# Altium PCB PCB_Akira_Joystick_2024-01-05.pcbdoc
Units mil, origin at the board's own origin, x right, y up, seen from the top; angles counter-clockwise.
Board outline 6165 x 3175.26 mil, 2 copper layers (Top Layer, Bottom Layer); 38 components, 36 nets, 153 pads, 44 vias.
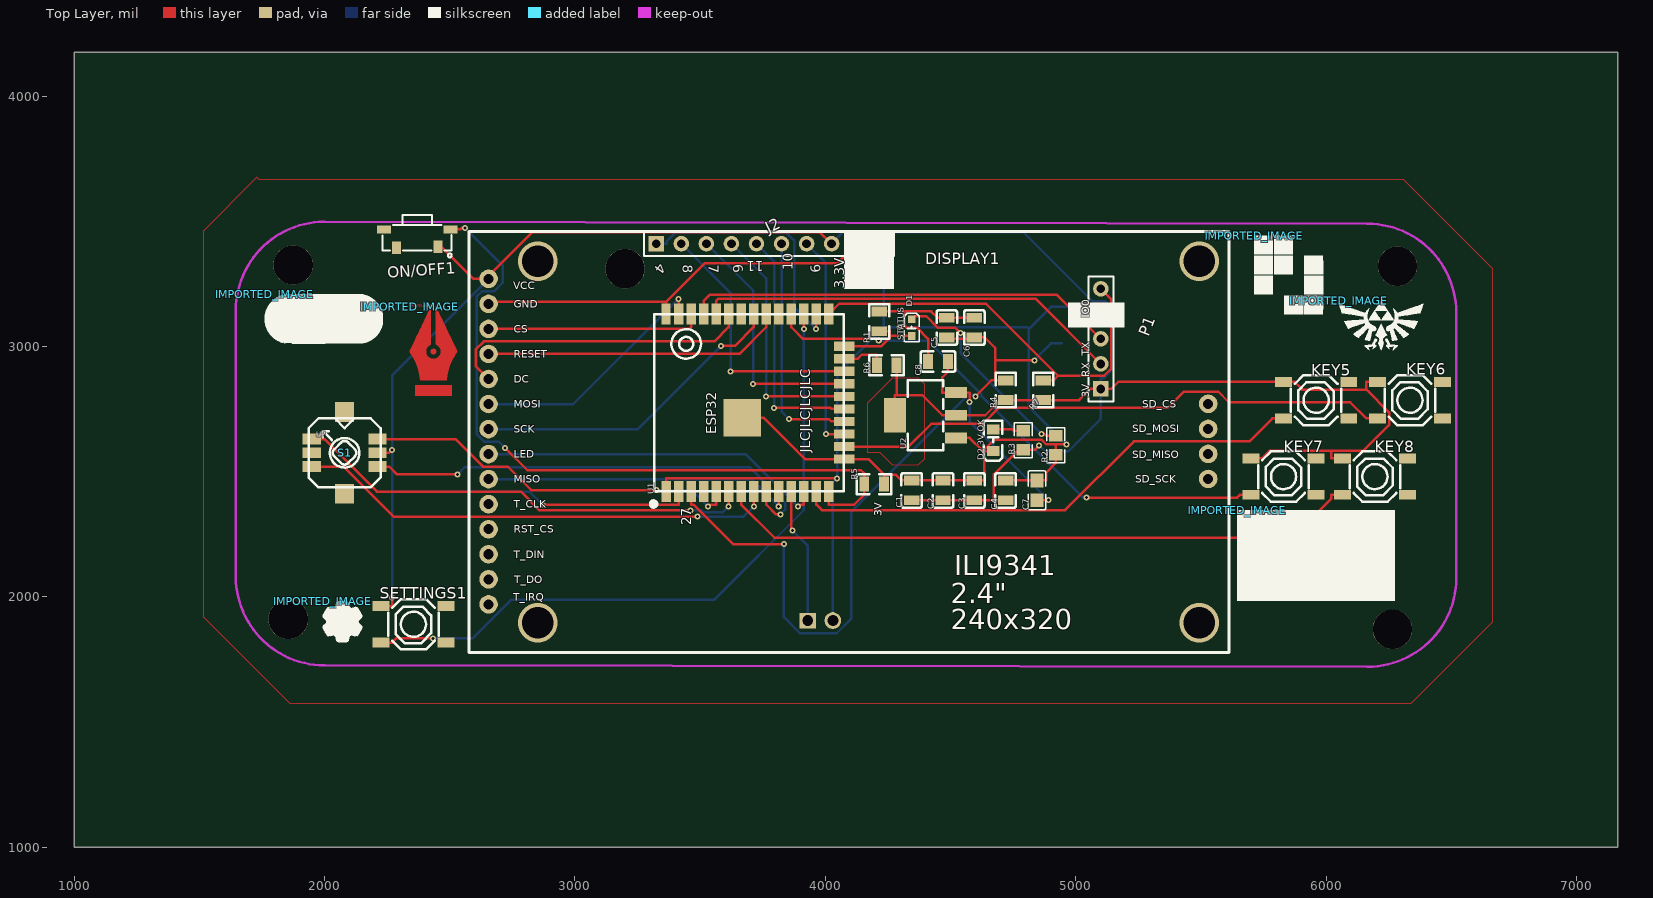
[diagram p0: Top Layer view]
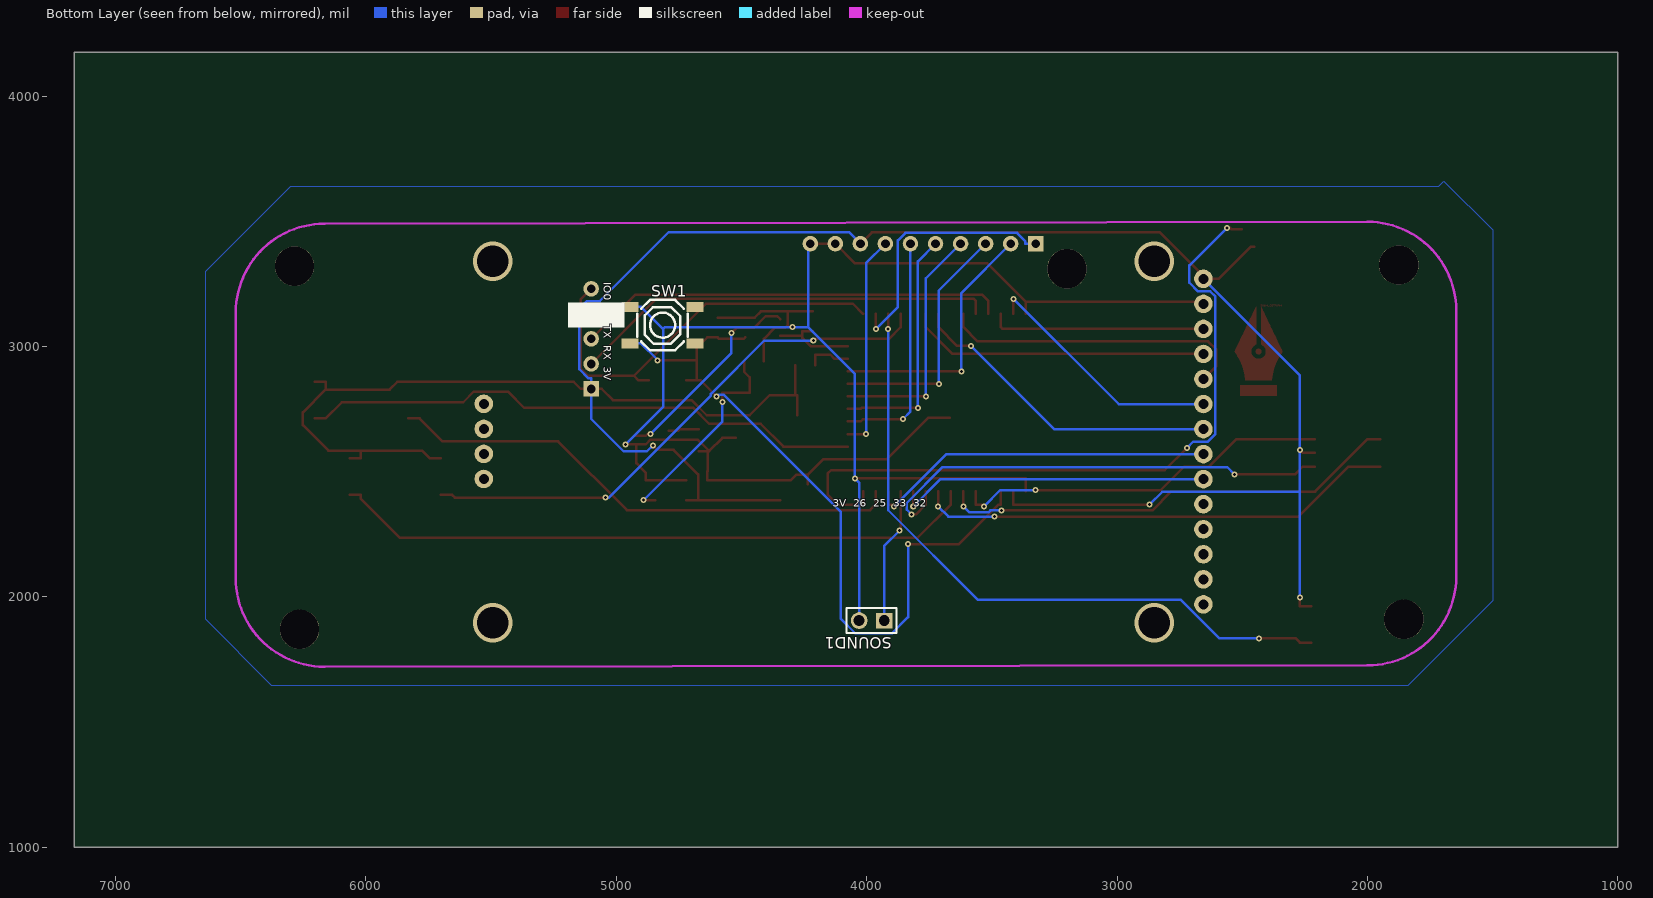
[diagram p1: Bottom Layer view, seen from below]

## Layer stack, top to bottom
Top Layer: signal copper (thickness not stored)
Dielectric: dielectric 12.6, FR-4, Dk 4.8
Bottom Layer: signal copper (thickness not stored)

## Board outline
7165,1000 1000,1000 1000,4175.26 7165,4175.26

## Components (designator, comment, footprint, x,y, rotation, side; value= is the part's Value field where it differs from the comment)
C1 "10uF" C0805#1 4345,2425.26 r270 top
C2 "10uF" C0805#1 4470,2425.26 r270 top
C3 "10uF" C0805#1 4595,2425.26 r90 top
C4 "100nF" C0805#1 4720,2425.26 r270 top
C5 "1uF" C0805#1 4485,3075.26 r270 top
C6 "100nF" C0805#1 4595,3075.26 r270 top
C7 "10uF" C0805#2 4845,2425.26 r270 top
C8 "100nF" C0805#1 4450,2940.26 r180 top
D1 "STATUS (BLUE)" LED0603-R-RD 4345,3075.26 r270 top
D2 "YELLOW" LED0805-RD 4670,2625.26 r90 top
DISPLAY1 "2.4_TFT_ILI9341_symbol" ILI9341_320X240_TFT_LCD 2655,3380.26 r0 top
IMPORTED_IMAGE "IMPORTED_IMAGE" IMPORTED_IMAGE#1 1761,3208.18 r0 top
IMPORTED_IMAGE "IMPORTED_IMAGE" IMPORTED_IMAGE#1 5645,2345.81 r0 top
IMPORTED_IMAGE "IMPORTED_IMAGE" IMPORTED_IMAGE#1 5712.18,3441.96 r0 top
IMPORTED_IMAGE "IMPORTED_IMAGE" IMPORTED_IMAGE#1 6051.12,3181.83 r0 top
IMPORTED_IMAGE "IMPORTED_IMAGE" IMPORTED_IMAGE#1 1992.99,1982.24 r0 top
IMPORTED_IMAGE "IMPORTED_IMAGE" IMPORTED_IMAGE#2 2339.78,3157.82 r0 top
J2 "HDR-M-2.54_1x10" HDR-M-2.54_1X10 3775,3410.26 r0 top
KEY5 "BUTTON_C9900016052" SW-SMD_4P-L5.1-W5.1-P3.70-LS6.5-TL-2#1 5960,2785.26 r0 top
KEY6 "BUTTON_C9900016052" SW-SMD_4P-L5.1-W5.1-P3.70-LS6.5-TL-2#1 6335,2785.26 r0 top
KEY7 "BUTTON_C9900016052" SW-SMD_4P-L5.1-W5.1-P3.70-LS6.5-TL-2#1 5830,2480.26 r0 top
KEY8 "BUTTON_C9900016052" SW-SMD_4P-L5.1-W5.1-P3.70-LS6.5-TL-2#1 6195,2480.26 r0 top
ON/OFF1 "TL3330AF260QG" SW-SMD_E-SWITCH_TL3330 2370,3430.3 r180 top
P1 "Header-Male-2.54_1x5" HDR-5X1/2.54 5100,3030.26 r90 top
R1 "10K" R0805#1 4215,3100.26 r270 top
R2 "470Ω" R0805#2 4920,2605.26 r270 top
R3 "470Ω" R0805#2 4790,2625.26 r270 top
R4 "10K" R0805#1 4720,2825.26 r270 top
R5 "10K" R0805#1 4195,2450.26 r180 top
R6 "10K" R0805#1 4245,2925.26 r180 top
R7 "10K" R0805#1 4870,2825.26 r90 top
S1 "JOYSTICK_MINI" JOYSTICK_MINI 2080,2575.26 r0 top
SETTINGS1 "BUTTON_C9900016052" SW-SMD_4P-L5.1-W5.1-P3.70-LS6.5-TL-2#1 2355,1890.26 r0 top
SOUND1 "HDR-M-2.54_1x2" HDR-M-2.54_1X2 3980,1905.26 r180 bottom
SW1 "RESET" SW-SMD_4P-L5.1-W5.1-P3.70-LS6.5-TL-2#2 4815,3085.26 r0 bottom
U1 "ESP32" WIFIM-SMD_38P-L19.2-W18.0-P1.27 3720,2775.26 r180 top
U2 "AMS1117-3.3" SOT-223-3_L6.5-W3.4-P2.30-LS7.0-BR 4400,2725.26 r0 top
? "" ? 4085,2078.63 r0 top

## Footprints (in the part's own frame and the unit in brackets; to place one, negate y for a bottom-side part, rotate by r counter-clockwise, add the part's x,y. Pads: shape width x height; smd on the part's side, far side on the other; paste and mask are expansions set on the pad)
C0805#1 [mm]
  rect 1x1.55 smd: 1(-1,0) 2(1,0)
  silkscreen extent -1.75,-1.04 1.75,1.04
C0805#2 [mm]
  rect 1.41x1.35 smd: 1(-1,0) 2(1,0)
  silkscreen extent -1.96,-0.9 1.96,0.9
HDR-5X1/2.54 [mil]
  rect 62x62 hole 35: 1(-200,0)
  round 62 hole 35: 2(-100,0) 3(0,0) 4(100,0) 5(200,0)
  silkscreen extent -250,-50 250,50
HDR-M-2.54_1X2 [mm]
  rect 1.7x1.575 hole 1.1: 1(1.27,0)
  round 1.7 hole 1.1: 2(-1.27,0)
  silkscreen extent -2.54,-1.27 2.54,1.27
HDR-M-2.54_1X10 [mil]
  rect 62x62 hole 35: 1(-450,0)
  round 62 hole 35: 2(-350,0) 3(-250,0) 4(-150,0) 5(-50,0) 6(50,0) 7(150,0) 8(250,0) 9(350,0) 10(450,0)
  silkscreen extent -500,-50 500,50
ILI9341_320X240_TFT_LCD [mm]
  round 1.88 hole 1.02: 1(0,-2.8) 2(0,-5.34) 3(0,-7.88) 4(0,-10.42) 5(0,-12.96) 6(0,-15.5) 7(0,-18.04) 8(0,-20.58) 9(0,-23.12) 10(0,-25.66) 11(0,-28.2) 12(0,-30.74) 13(0,-33.28) 14(0,-35.82) 15(73,-23.1) 16(73,-20.56) 17(73,-18.02) 18(73,-15.48)
  silkscreen extent -2,-40.7 75.1,2
IMPORTED_IMAGE#1 [mil]
  silkscreen extent 0,-197 472,0
IMPORTED_IMAGE#2 [mil]
  Top Layer region: 21.63,-355.12 21.63,-312.71 168.52,-312.71 168.52,-355.12
  Top Layer region: 532 vertices and 0 holes, not listed, extent -0.25,-293.03 190.71,0
  Top Layer region: 94.56,-189.47 94.1,-189.46 93.66,-189.41 93.21,-189.35 92.77,-189.26 92.34,-189.16 91.91,-189.03 91.49,-188.88 91.07,-188.71 90.66,-188.52 90.26,-188.31 89.87,-188.09 89.48,-187.84 89.11,-187.58 88.74,-187.31 88.39,-187.01 88.04,-186.71 87.7,-186.39 87.38,-186.05 87.07,-185.7 86.77,-185.34 86.48,-184.97 86.21,-184.59 85.95,-184.19 85.7,-183.79 85.47,-183.38 85.25,-182.96 85.05,-182.53 84.86,-182.09 84.7,-181.65 84.54,-181.2 84.41,-180.74 84.29,-180.28 84.19,-179.82 84.11,-179.35 84.05,-178.88 84.01,-178.41 83.99,-177.94 83.99,-177.46 84.02,-176.99 84.06,-176.51 84.12,-176.04 84.21,-175.57 84.32,-175.1 84.46,-174.63 84.62,-174.16 84.8,-173.7 85.01,-173.25 85.24,-172.8 85.5,-172.35 85.79,-171.92 86.1,-171.49 86.44,-171.06 86.81,-170.65 87.57,-169.93 88.43,-169.29 89.36,-168.75 90.36,-168.29 91.4,-167.92 92.48,-167.65 93.59,-167.46 94.7,-167.37 95.81,-167.36 96.9,-167.46 97.95,-167.64 98.96,-167.92 99.9,-168.29 100.77,-168.76 101.55,-169.33 102.23,-169.99 102.74,-170.58 103.2,-171.18 103.63,-171.79 104.02,-172.39 104.37,-172.99 104.68,-173.6 104.96,-174.2 105.19,-174.81 105.39,-175.41 105.55,-176.01 105.68,-176.61 105.76,-177.21 105.81,-177.8 105.82,-178.39 105.79,-178.98 105.72,-179.56 105.62,-180.14 105.48,-180.72 105.3,-181.28 105.09,-181.84 104.84,-182.4 104.55,-182.94 104.22,-183.48 103.86,-184.01 103.46,-184.54 103.03,-185.05 102.55,-185.55 102.04,-186.04 101.5,-186.53 100.91,-187 100.29,-187.46 99.64,-187.91 99.18,-188.19 98.71,-188.45 98.25,-188.67 97.78,-188.87 97.32,-189.04 96.85,-189.18 96.39,-189.29 95.93,-189.37 95.47,-189.43 95.01,-189.46
JOYSTICK_MINI [mil]
  rect 72.8x43.3 smd: A(-131,55) B(131,55) C(-131,-55) CTR(-131,0) D(131,-55) GND(131,0)
  rect 74.8x78.7 smd: NC(0,163) NC@0(0,-163)
  silkscreen extent -144,-138 144,138
LED0603-R-RD [mm]
  rect 0.8x0.8 smd: 1(0.851,0) 2(-0.851,0)
  silkscreen extent -1.44,-0.75 1.44,0.75
LED0805-RD [mm]
  rect 1x1.25 smd: 1(-1.1,0) 2(1.1,0)
  silkscreen extent -2.1,-0.95 1.98,0.96
R0805#1 [mm]
  rect 1x1.55 smd: 1(-1,0) 2(1,0)
  silkscreen extent -1.75,-1.02 1.75,1.02
R0805#2 [mm]
  rect 1.133x1.377 smd: 1(-0.966,0) 2(0.966,0)
  silkscreen extent -1.76,-0.92 1.76,0.92
SOT-223-3_L6.5-W3.4-P2.30-LS7.0-BR [mm]
  rect 2.2x1.1 smd: 1(3.099,-2.3) 2(3.099,0) 3(3.099,2.3)
  rect 2.2x3.5 smd: 4(-3.099,0)
  silkscreen extent -1.8,-3.55 1.8,3.55
SW-SMD_4P-L5.1-W5.1-P3.70-LS6.5-TL-2#1 [mm]
  rect 1.7x1 smd: 1(-3.3,1.85) 2(3.3,1.85) 3(-3.3,-1.85) 4(3.3,-1.85)
  silkscreen extent -2.55,-2.55 2.55,2.55
SW-SMD_4P-L5.1-W5.1-P3.70-LS6.5-TL-2#2 [mm]
  rect 1.7x1 smd: 1(3.3,-1.849) 2(-3.3,-1.85) 3(3.3,1.85) 4(-3.3,1.85)
  silkscreen extent -2.55,-2.55 2.55,2.55
SW-SMD_E-SWITCH_TL3330 [mm]
  rect 0.9x1.27 smd: 1(-2.1,0.84) 2(2.1,0.94)
  rect 1.45x0.8 smd: 3(3.375,-0.94) 4(-3.375,-0.94)
  silkscreen extent -3.5,-2.4 3.5,1.9
WIFIM-SMD_38P-L19.2-W18.0-P1.27 [mm]
  rect 0.95x2.1 smd: 1(9.045,9) 2(7.775,9) 3(6.505,9) 4(5.235,9) 5(3.965,9) 6(2.695,9) 7(1.425,9) 8(0.155,9) 9(-1.115,9) 10(-2.385,9) 11(-3.655,9) 12(-4.925,9) 13(-6.195,9) 14(-7.465,9) 25(-7.465,-9) 26(-6.195,-9) 27(-4.925,-9) 28(-3.655,-9) 29(-2.385,-9) 30(-1.115,-9) 31(0.155,-9) 32(1.425,-9) 33(2.695,-9) 34(3.965,-9) 35(5.235,-9) 36(6.505,-9) 37(7.775,-9) 38(9.045,-9)
  rect 2.1x0.95 smd: 15(-9.045,5.715) 16(-9.045,4.445) 17(-9.045,3.175) 18(-9.045,1.905) 19(-9.045,0.635) 20(-9.045,-0.635) 21(-9.045,-1.905) 22(-9.045,-3.175) 23(-9.045,-4.445) 24(-9.045,-5.715)
  rect 3.8x3.8 smd: 39(1.32,1.51)
  silkscreen extent -8.96,-9 10.55,10.51
? [mil]

## Free pads (board coordinates)
  round 157.48 hole 157.48 unplated: ""(1855,1910.26) ""(1875,3325.26) ""(3200,3310.26) ""(6265,1870.26) ""(6285,3320.26)

## Via types
v1: diameter 24.02, hole 12.01, Top Layer to Bottom Layer, tented both sides, 40 vias
v2: diameter 157.48, hole 125.98, Top Layer to Bottom Layer, tented both sides, 4 vias

## Nets (pads, with @x,y where several pads share a name; then routed paths per layer and width w, separated by ;. In a path a pad name is that pad's centre, name@x,y a point inside that pad or via, vN(x,y) a via of type N, cw(c..) or ccw(c..) an arc to the next point about the centre after c; other vN are vias at no path point)
3.3V: C7.2 C8.1 U2.3 | length 848.6
  Top Layer w10: C8.1 4489.37,2898.76 4467.7,2877.09 4467.7,2815.81 U2.3 4576.3,2815.81 4576.3,2810.87 4576.01,2810.58 4576.01,2791.48 4576.3,2791.19 v1(4576.3,2778.39) ; C7.2 v1(4891.02,2385.89)
  Bottom Layer w10: v1(4576.3,2778.39) 4576.3,2700.61 v1(4891.02,2385.89)
+3.3V: C1.2 C2.2 C3.1 C4.2 DISPLAY1.1 J2.8 KEY5.1 KEY6.1 KEY7.1 KEY8.1 ON/OFF1.1 P1.1 R3.2 R4.2 R6.1 R7.1 S1.GND SETTINGS1.1 U1.2 U2.2 U2.4 | length 10390
  Top Layer w10: S1.GND 2258.39,2575.26 2269.53,2586.4 v1(2269.53,2587.24) ; SETTINGS1.1 2269.53,1963.1 v1(2269.53,1998.06) ; ON/OFF1.1 2467.03,3397.23 2594.24,3270.02 DISPLAY1.1 2655,3281.62 2829.22,3455.84 3979.42,3455.84 J2.8 ; v1(2870.22,2368.53) 3413.83,2368.53 3413.9,2368.6 3413.9,2394.77 U1.2 ; U2.4 4278,2805.15 4284.37,2805.15 ; R6.1 4284.37,2805.15 ; C1.2 C2.2 C3.1 4673.12,2385.89 ; C4.2 4673.12,2385.89 ; v1(4854.11,2604.65) 4836.68,2587.22 R3.2 4770.95,2587.22 4673.12,2489.39 4673.12,2385.89 ; KEY7.1 5744.53,2553.1 5775.28,2583.85 6020.62,2583.85 ; KEY8.1 6020.62,2553.1 6020.62,2583.85 ; KEY6.1 6160.62,2858.1 6160.62,2827.36 ; 4284.37,2805.15 4387.81,2805.15 4467.7,2725.26 U2.2 4638.62,2725.26 4699.25,2785.89 R4.2 R7.1 5013.64,2785.89 5058.01,2830.26 P1.1 5121,2830.26 5141.99,2830.26 5169.83,2858.1 KEY5.1 5852.31,2858.1 5874.53,2858.1 5905.27,2827.36 6160.62,2827.36 ; 6020.62,2583.85 6149.59,2583.85 6251.43,2685.69 6251.43,2736.55 6160.62,2827.36
  Bottom Layer w10: v1(2269.53,1998.06) 2269.53,2419.36 ; DISPLAY1.1 2269.53,2884.55 v1(2269.53,2587.24) 2269.53,2419.36 ; v1(2870.22,2368.53) 2819.39,2419.36 2269.53,2419.36 ; J2.8 4071.21,3456.47 4790.33,3456.47 5065.96,3180.84 5116.28,3180.84 5147.91,3149.21 5147.91,2909.66 5110.5,2872.25 5100,2872.25 P1.1 5100,2710.75 4970.61,2581.36 4877.4,2581.36 v1(4854.11,2604.65)
CS: DISPLAY1.3 U1.36 | length 864.2
  Top Layer w10: DISPLAY1.3 3456.66,3070.02 3463.9,3077.26 U1.36
DC: DISPLAY1.5 U1.33 | length 1239
  Top Layer w10: DISPLAY1.5 2603.07,2921.95 2603.07,2987 2636.09,3020.02 3556.66,3020.02 3613.9,3077.26 U1.33
EN: C5.2 C6.2 R4.1 SW1.3 U1.3 | length 3007.7
  Top Layer w10: U1.3 3463.9,2368.6 3473.41,2368.6 3631.41,2210.6 v1(3834.29,2210.6) ; C5.2 4490.93,3029.96 4589.07,3029.96 C6.2 4636.5,3035.89 4678.5,2993.89 4678.5,2943.89 ; v1(4599.07,2801.03) 4662.67,2864.63 4678.5,2864.63 ; R4.1 4678.5,2864.63 ; v1(4836.17,2943.89) 4678.5,2943.89 ; 4678.5,2864.63 4678.5,2943.89
  Bottom Layer w10: v1(3834.29,2210.6) 3834.29,1919.02 3898.67,1854.64 4045.63,1854.64 4102.9,1911.91 4102.9,2338.24 4571.95,2807.29 4592.81,2807.29 v1(4599.07,2801.03) ; v1(4836.17,2943.89) 4836.17,2948.11 4900.47,3012.41 SW1.3
GND: C1.1 C2.1 C3.2 C4.1 C5.1 C6.1 C7.1 C8.2 D2.1 DISPLAY1.2 J2.9 J2.10 P1.4 R1.1 R2.2 R5.1 SOUND1.2 SW1.1 U1.1 U1.15 U1.38 U1.39 U2.1 | length 8240.4
  Top Layer w10: DISPLAY1.2 2662.93,3177.95 3363.9,3177.95 ; U1.1 3363.9,2473.26 3363.96,2473.32 v1(4047.12,2473.32) ; U1.38 3363.9,3177.95 ; U1.39 3753.82,2715.82 3919.38,2550.26 U1.15 4171.9,2550.26 4234.37,2487.79 ; R1.1 4315.12,3139.63 ; J2.10 J2.9 4046.26,3331.52 3517.47,3331.52 3363.9,3177.95 ; R5.1 4234.37,2487.79 ; v1(4296.52,3076.73) 4306.77,3076.73 4315.12,3085.08 ; C8.2 4410.63,3029.96 4365.33,3075.26 4324.94,3075.26 4315.12,3085.08 ; U2.1 4576.3,2634.71 4629.06,2581.95 4634.4,2581.95 ; C6.1 C5.1 4447.47,3114.63 4422.47,3139.63 4315.12,3139.63 ; D2.1 4634.4,2581.95 ; C4.1 C7.1 4882.57,2464.63 4882.57,2496.5 4920,2533.93 4920,2564.55 R2.2 4920,2600.5 4920,2609.14 ; v1(4962.38,2609.14) 4920,2609.14 ; 4234.37,2487.79 4280.34,2487.79 4303.5,2464.63 C1.1 C2.1 C3.2 4636.5,2464.63 4636.5,2501.07 4634.4,2503.17 4634.4,2581.95 ; 4315.12,3085.08 4315.12,3139.63 ; 4634.4,2581.95 4634.4,2587.29 4674.82,2627.71 4863.67,2627.71 4882.24,2609.14 4920,2609.14
  Bottom Layer w10: SOUND1.2 4030,2456.2 v1(4047.12,2473.32) 4047.12,2890.23 4232.97,3076.08 ; J2.10 4232.97,3402.29 4232.97,3076.08 ; v1(4296.52,3076.73) v1@4296.52,3076.08 ; v1(4962.38,2609.14) 4812.56,2758.96 4812.56,3070.15 ; P1.4 5017.18,3130.26 4989.38,3158.06 SW1.1 4900.47,3158.06 4812.56,3070.15 ; 4232.97,3076.08 v1@4296.52,3076.08 ; v1@4296.52,3076.08 4806.63,3076.08 4812.56,3070.15
GPIO0: P1.5 R7.2 U1.25 | length 1679.4
  Top Layer w10: U1.25 4054.69,3170.38 4642.29,3170.38 4929.77,2882.9 ; R7.2 4911.5,2864.63 4929.77,2882.9 ; P1.5 5142.33,3187.93 5142.33,2912.3 5112.93,2882.9 4929.77,2882.9
GPIO4: J2.1 U1.26 | length 1036.8
  Top Layer w10: v1(3962.79,3069.66) 3963.9,3070.77 U1.26
  Bottom Layer w10: J2.1 3366.99,3410.26 3366.99,3420.76 3399.39,3453.16 3845.39,3453.16 3875,3423.55 3875,3157.45 v1(3962.79,3069.66)
GPIO6: J2.4 U1.20 | length 979.7
  Top Layer w10: v1(3763.92,2800.26) U1.20
  Bottom Layer w10: J2.4 3763.92,3271.34 v1(3763.92,2800.26)
GPIO7: J2.3 U1.21 | length 1001.6
  Top Layer w10: v1(3711.97,2850.26) U1.21
  Bottom Layer w10: J2.3 3711.97,3223.29 v1(3711.97,2850.26)
GPIO8: J2.2 U1.22 | length 1045.7
  Top Layer w10: v1(3621.97,2900.26) U1.22
  Bottom Layer w10: J2.2 3621.97,3213.29 v1(3621.97,2900.26)
GPIO9: J2.7 U1.17 | length 865.9
  Top Layer w10: v1(4002.2,2650.26) U1.17
  Bottom Layer w10: J2.7 4002.2,3333.06 v1(4002.2,2650.26)
GPIO10: J2.6 U1.18 | length 937.8
  Top Layer w10: v1(3855.73,2709.3) 4014.73,2709.3 4023.77,2700.26 U1.18
  Bottom Layer w10: J2.6 3825,2740.03 v1(3855.73,2709.3)
GPIO11: J2.5 U1.19 | length 967.3
  Top Layer w10: v1(3795.41,2754.54) 4019.49,2754.54 4023.77,2750.26 U1.19
  Bottom Layer w10: J2.5 3795.41,3339.85 v1(3795.41,2754.54)
KEY1: S1.A U1.6 | length 1856
  Top Layer w10: S1.A 1999.02,2630.26 2209.26,2420.02 2784.51,2420.02 2859.06,2345.47 v1(3461.86,2345.47) ; v1(3613.9,2361.09) U1.6
  Bottom Layer w10: v1(3461.86,2345.47) 3505.48,2345.47 3513.72,2337.23 3590.04,2337.23 v1(3613.9,2361.09)
KEY2: S1.B U1.5 | length 1519.5
  Top Layer w10: S1.B 2522.21,2630.26 2632.45,2520.02 2731.53,2520.02 2825.79,2425.76 v1(3326.21,2425.76) ; v1(3531.03,2361.44) 3538.19,2368.6 3563.9,2368.6 U1.5
  Bottom Layer w10: v1(3326.21,2425.76) 3466.71,2425.76 v1(3531.03,2361.44)
KEY3: S1.D U1.9 | length 1891.7
  Top Layer w10: S1.D 2258.39,2520.26 2289.36,2489.29 v1(2530.94,2489.29) ; U1.9 3763.9,2368.6 3803.25,2329.25 v1(3820.42,2329.25)
  Bottom Layer w10: v1(2530.94,2489.29) 2559.74,2518.09 3696.48,2518.09 3839.92,2374.65 3839.92,2348.75 v1(3820.42,2329.25)
KEY4: S1.C U1.8 | length 1925.9
  Top Layer w10: S1.C 2075.82,2520.26 2276.06,2320.02 v1(3489.37,2320.02) ; U1.8 3713.9,2368.6 3714.76,2367.74 v1(3714.76,2361.12)
  Bottom Layer w10: v1(3489.37,2320.02) 3673.66,2320.02 v1(3714.76,2361.12)
KEY5: KEY5.3 U1.13 | length 2079.6
  Top Layer w10: U1.13 3963.9,2368.6 3986.48,2346.02 4957.55,2346.02 5232.34,2620.81 5694.01,2620.81 5785.62,2712.42 KEY5.3
KEY6: KEY6.3 U1.16 | length 2264
  Top Layer w10: U1.16 4332.84,2600.26 4423.78,2691.2 4629.01,2691.2 4692.32,2754.51 5367.58,2754.51 5432.4,2819.33 5569.06,2819.33 5611.16,2777.23 6095.81,2777.23 6160.62,2712.42 KEY6.3
KEY7: KEY7.3 U1.28 | length 2178.8
  Top Layer w10: U1.28 3863.9,3077.26 3911.01,3030.15 4205.99,3030.15 v1(4213.28,3022.86) ; v1@5042.05,2396.59 5644.79,2396.59 5655.62,2407.42 KEY7.3
  Bottom Layer w10: v1(4213.28,3022.86) 4409.86,3022.86 4622.13,2810.59 4622.13,2804.02 5029.56,2396.59 v1@5042.05,2396.59
  other v1: 5042.05,2396.59
KEY8: KEY8.3 U1.7 | length 2588
  Top Layer w10: U1.7 3663.9,2368.6 3795.97,2236.53 5865.07,2236.53 6020.62,2392.08 6020.62,2407.42 KEY8.3
KEY_ON/OFF: ON/OFF1.4 R5.2 U1.14 | length 2926.8
  Top Layer w10: ON/OFF1.4 2542.36,3467.3 2548.83,3473.77 v1(2561,3473.77) ; v1(2721.3,2594.31) 2809.48,2506.13 4141.26,2506.13 4155.63,2491.76 R5.2 4155.63,2408.76 4115.47,2368.6 4013.9,2368.6 U1.14
  Bottom Layer w10: v1(2561,3473.77) 2711.37,3323.4 2711.37,3254.47 2676.92,3220.02 2627.71,3220.02 2606.93,3199.24 2606.93,2650.1 2637.01,2620.02 2695.59,2620.02 v1(2721.3,2594.31)
KEY_SETTINGS: SETTINGS1.3 U1.27 | length 2691.5
  Top Layer w10: SETTINGS1.3 2269.53,1817.42 2285.72,1833.61 v1(2433.15,1833.61) ; v1(3913.9,3069.15) U1.27
  Bottom Layer w10: v1(2433.15,1833.61) 2591.27,1833.61 2746.37,1988.71 3556.86,1988.71 3913.9,2345.75 v1(3913.9,3069.15)
LED: DISPLAY1.8 U1.12 | length 1401.2
  Top Layer w10: v1(3890.18,2360.69) 3898.09,2368.6 3913.9,2368.6 U1.12
  Bottom Layer w10: DISPLAY1.8 3680.85,2570.02 v1(3890.18,2360.69)
MISO: DISPLAY1.9 U1.10 | length 1264
  Top Layer w10: v1(3813.9,2360.99) U1.10
  Bottom Layer w10: DISPLAY1.9 3704.87,2470.02 v1(3813.9,2360.99)
MOSI: DISPLAY1.6 U1.37 | length 992
  Top Layer w10: v1(3412.79,3189.57) 3413.9,3188.46 U1.37
  Bottom Layer w10: DISPLAY1.6 2993.24,2770.02 v1(3412.79,3189.57)
R1_2: D1.1 R1.2 U1.24 | length 352
  Top Layer w10: U1.24 4128.43,3000.26 4128.89,2999.8 4222.84,2999.8 4256.5,3033.46 4256.5,3041.76 ; R1.2 4256.5,3060.89 4256.5,3041.76 ; D1.1 4256.5,3041.76
R2_1: D1.2 R2.1 | length 824.5
  Top Layer w10: D1.2 4357.24,3121 4402.84,3121 4449.87,3073.97 4519.05,3073.97 v1(4540,3053.02) ; v1(4862.62,2650.89) 4874.31,2650.89 4881.9,2643.3 R2.1
  Bottom Layer w10: v1(4540,3053.02) 4540,2973.51 v1(4862.62,2650.89)
R3_1: D2.2 R3.1 | length 122.2
  Top Layer w10: D2.2 4746.63,2668.57 4751.9,2663.3 R3.1
R6_2: R6.2 U1.23 | length 177.9
  Top Layer w10: U1.23 4128.43,2950.26 4144.93,2966.76 4205.63,2966.76 R6.2
RESET: DISPLAY1.4 U1.30 | length 1205.7
  Top Layer w10: DISPLAY1.4 3656.66,2970.02 3763.9,3077.26 U1.30
RX: P1.2 U1.34 | length 1699.2
  Top Layer w10: U1.34 3563.9,3181.92 3571.76,3189.78 4840.48,3189.78 P1.2
SCK: DISPLAY1.7 U1.31 | length 1279.9
  Top Layer w10: v1(3582.84,3001.82) 3638.46,3001.82 3713.9,3077.26 U1.31
  Bottom Layer w10: DISPLAY1.7 3251.04,2670.02 v1(3582.84,3001.82)
SOUND: SOUND1.1 U1.11 | length 543
  Top Layer w10: U1.11 3863.9,2269.04 v1(3867.91,2265.03)
  Bottom Layer w10: v1(3867.91,2265.03) 3930,2202.94 SOUND1.1
TX: P1.3 U1.35 | length 1721.1
  Top Layer w10: U1.35 3513.9,3181.92 3537.81,3205.83 4924.43,3205.83 P1.3
pads on no net: DISPLAY1.10 DISPLAY1.11 DISPLAY1.12 DISPLAY1.13 DISPLAY1.14 DISPLAY1.15 DISPLAY1.16 DISPLAY1.17 DISPLAY1.18 KEY5.2 KEY5.4 KEY6.2 KEY6.4 KEY7.2 KEY7.4 KEY8.2 KEY8.4 ON/OFF1.2 ON/OFF1.3 S1.CTR S1.NC S1.NC@0 SETTINGS1.2 SETTINGS1.4 SW1.2 SW1.4 U1.4 U1.29 U1.32
copper on no net:
  other v2: 2851.85,1896.01 5493.58,1896.01 2851.85,3340.89 5493.58,3340.89

## Polygon pours and split planes (outlines as drawn)
+3.3V on Top Layer (solid): 4395,2725.26 4395,2550.26 4370,2525.26 4270,2525.26 4220,2575.26 4170,2575.26 4170,2775.26 4270,2875.26 4370,2875.26 4395,2850.26
GND on Top Layer (solid): 1515,3460.26 1515,1920.26 1860,1575.26 6340,1575.26 6665,1900.26 6665,3310.26 6310,3665.26 1740,3665.26 1730,3675.26
GND on Bottom Layer (solid): 1500,3465.26 1500,1985.26 1840,1645.26 6375,1645.26 6640,1910.26 6640,3300.26 6300,3640.26 1715,3640.26 1695,3660.26

## Keep-outs
Keep-Out Layer:
  lines w10: 1645.59,2080.65 ccw(c1999.92,2080.65) 1999.92,1726.32 ; 1645.59,3143.64 cw(c1999.92,3143.64) 1999.92,3497.97 ; 6165,3490.26 cw(c6165,3135.93) 6519.33,3135.93 ; 6165.67,1720.93 ccw(c6165.67,2075.26) 6520,2075.26

## Silkscreen, mask and mechanical layers (free items; w line width, h text height)
Top Overlay:
  rectangle: 4970,3075.26 5195,3175.26
  rectangle: 4075,3230.26 4175,3455.26
  rectangle: 4175,3230.26 4275,3455.26
  text "11" at 3755,3340.56 h40 r180
  text "4" at 3333.82,3337.02 h40 r234
  text "8" at 3430,3325.26 h40 r270
  text "7" at 3535,3325.26 h40 r270
  text "6" at 3630.08,3325.42 h40 r275
  text "9" at 3940.08,3325.42 h40 r275
  text "10" at 3870,3304.26 h40 r90
  text "3.3V" at 4075,3230.26 h40 r90
  text "STATUS" at 4312.5,3025.26 h25 r90
  text "3V  RX  TX       IO0" at 5054.79,2795.1 h30 r90
  text "3V OK" at 4632.36,2603.49 h25 r90
  text "JLCJLCJLCJLC" at 3940,2575.26 h40 r90
  text "3V" at 4224.93,2321.87 h30 r90
  text "27" at 3465,2285.26 h40 r90
Bottom Overlay:
  rectangle: 4967.5,3075.26 5192.5,3175.26
  text "IO0       TX  RX  3V" at 5049.72,3256.71 h30 r90
  text "3V  26  25  33  32" at 4135,2360.26 h30

## Text inside footprints (layer, text, board x,y; h text height)
DISPLAY1: Top Overlay "RESET" at 2755,2955.02 h30; Top Overlay "MOSI" at 2755,2755.02 h30; Top Overlay "T_DIN" at 2755,2155.02 h30; Top Overlay "T_DO" at 2758.22,2055.02 h30; Top Overlay "T_CLK" at 2755,2355.02 h30; Top Overlay "MISO" at 2755,2455.02 h30; Top Overlay "RST_CS" at 2755,2255.02 h30; Top Overlay "CS" at 2755,3055.02 h30; Top Overlay "T_IRQ" at 2753.43,1983.37 h30; Top Overlay "LED" at 2755,2555.02 h30; Top Overlay "SCK" at 2755,2655.02 h30; Top Overlay "DC" at 2755,2855.02 h30; Top Overlay "GND" at 2755,3155.02 h30; Top Overlay "VCC" at 2753.43,3227.46 h30; Top Overlay "SD_SCK" at 5237.68,2455.81 h30; Top Overlay "SD_CS" at 5265.24,2755.02 h30; Top Overlay "SD_MOSI" at 5225.87,2656.6 h30; Top Overlay "SD_MISO" at 5225.87,2554.24 h30; Top Overlay "ILI9341" at 4515,2085.26 h80; Top Overlay "2.4\"" at 4500,1975.26 h80; Top Overlay "240x320" at 4500,1870.26 h80
S1: Top Overlay "UP" at 1966,2640.26 h20; Document "UP" at 1966,2640.26 h20